# EAGLE board Fantabulous Fulffy (EAGLE 9.7.0)

Size 96.75 x 127.26 mm. Coordinates in mm from the lower left corner, seen from the top.
Outline: 0,0 96.75,0 96.75,127.25 0,127.25 0,0
Copper layers (1*16): Top 0.035mm / dielectric 1.5mm / Bottom 0.035mm
Design rules "default": minimum track width 6mil, minimum drill 0.35mm, track to track 6mil, track to pad 6mil, pad to pad 6mil, via to via 6mil, smd to smd 6mil, copper to edge 40mil, drill to drill 6mil, minimum pad ring 10mil, minimum via ring 8mil, stop-mask expansion 4mil, vias tented up to drill 0mil, thermal gap 10mil

## Footprints (pad centres in the part's own frame; a part is rotated, then mirrored left to right if it is on the bottom)
LEDRD254W60D565H860B = drill 0.981 pad 1.581: 1 -1.27,0; 2 1.27,0
RESAD1016W63L850D250B = drill 0.83 pad 1.43: 1 -5.08,0; 2 5.08,0
ARDUINO-UNO-R3-SHIELD = drill 1.016 pad 1.88: 3.3V 24.13,-2.54; 5V 24.13,0; A0 24.13,12.7; A1 24.13,15.24; A2 24.13,17.78; A3 24.13,20.32; A4 24.13,22.86; A5 24.13,25.4; AREF -24.13,-13.97; D2 -24.13,20.32; D3 -24.13,17.78; D4 -24.13,15.24; D5 -24.13,12.7; D6 -24.13,10.16; D7 -24.13,7.62; D8 -24.13,3.81; D9 -24.13,1.27; D10 -24.13,-1.27; D11 -24.13,-3.81; D12 -24.13,-6.35; D13 -24.13,-8.89; GND@0 24.13,2.54; GND@1 24.13,5.08; GND@2 -24.13,-11.43; IOREF 24.13,-7.62; NC 24.13,-10.16; RES 24.13,-5.08; RX -24.13,25.4; SCL -24.13,-19.05; SDA -24.13,-16.51; TX -24.13,22.86; VIN 24.13,7.62
TSOP48 = drill 0.8: 1 -2.54,0; 2 0,0; 3 2.54,0
LEDRD254W51D580H541B = drill 0.921 pad 1.521: A -1.27,0; C 1.27,0

## Placement (x,y rotation side)
D2  RED  [LEDRD254W60D565H860B]  46.77,103.13 180 top
R1  1k  [RESAD1016W63L850D250B]  12.48,103.13 0 top
R2  1k  [RESAD1016W63L850D250B]  50.59,108.21 0 top
U1  ARDUINO-UNO-R3-SHIELD  [ARDUINO-UNO-R3-SHIELD]  62.24,29.84 270 top
U2  IR-RECEIVERTSOP48  [TSOP48]  7.41,120.91 0 top
U3  PHOTODIODE  [LEDRD254W51D580H541B]  6.13,105.67 180 top

## Library data of the parts
D2 = Tinkercad; CATEGORY: Opto-Electronic; SUB-CATEGORY: LED; VALUE: LED_RED
R1 R2 U1-U3 = Tinkercad

## Nets
U1_AREF: U1.AREF U2.1
U1_D11: D2.2 R2.1 U1.D11 U2.2 U3.C
U1_D12: R2.2 U1.D12
U1_D13: R1.2 U1.D13
U1_GND: U1.GND@0 U1.GND@1 U1.GND@2 U2.3
U3_A: R1.1 U3.A

## Tracks (layer width: path | path; a pad name or v marks a point on that pad's centre or on a via)
U1_AREF  (1 unrouted)
U1_D11  (4 unrouted)
U1_D12  (1 unrouted)
U1_D13  (1 unrouted)
U1_GND  (3 unrouted)
U3_A  (1 unrouted)